# EAGLE board SI4464Breakout (EAGLE 6.3)
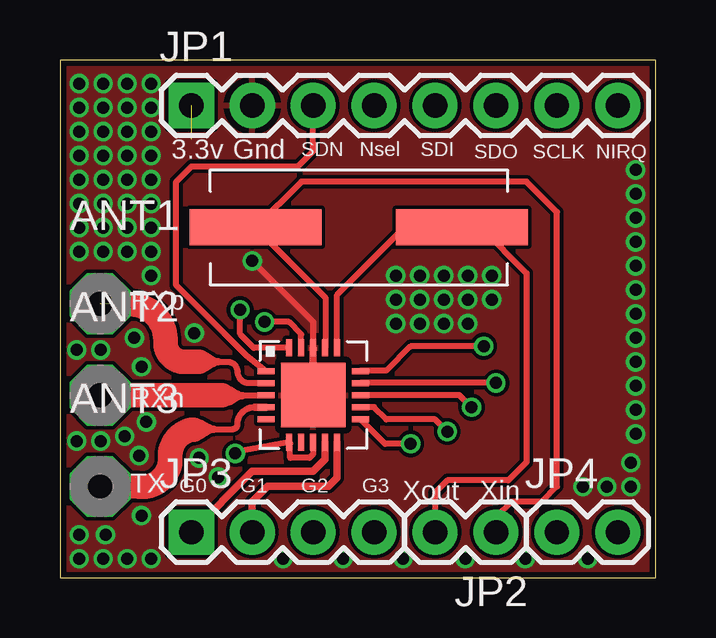
[diagram p0: board, top side]
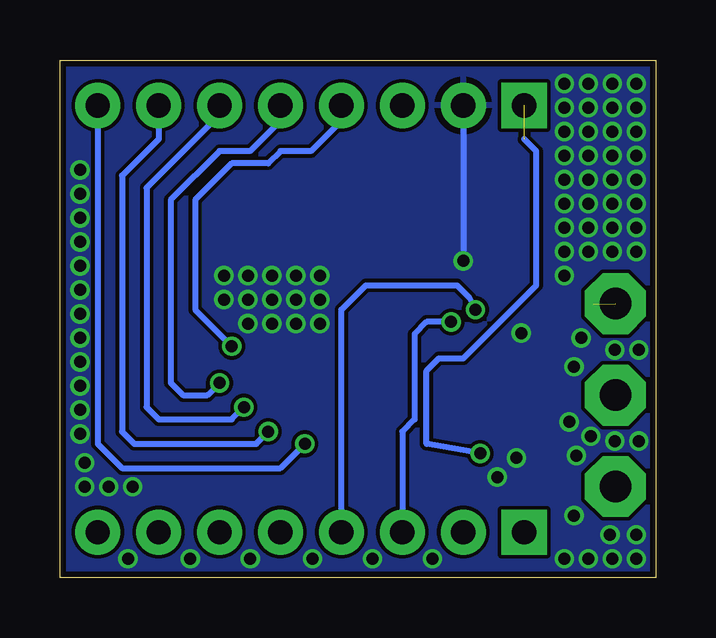
[diagram p1: board, bottom side, seen from below]

Size 24.83 x 21.58 mm. Coordinates in mm from the lower left corner, seen from the top.
Outline: 0,0 24.83,0 24.83,21.58 0,21.58 0,0
Copper layers (1*2*15*16): Top 0.035mm / dielectric 0.2mm / layer 2 0.0175mm / dielectric 1.1mm / layer 15 0.0175mm / dielectric 0.2mm / Bottom 0.035mm
Design rules "SeeedStudio_DRU_no_angle_20130527": minimum track width 6mil, minimum drill 12mil, track to track 6mil, track to pad 6mil, pad to pad 6mil, via to via 6mil, smd to smd 0mil, copper to edge 10mil, drill to drill 10mil, minimum pad ring 6mil, minimum via ring 6mil, stop-mask expansion 2mil, vias tented up to drill 25mil, thermal gap 10mil

## Footprints (pad centres in the part's own frame; a part is rotated, then mirrored left to right if it is on the bottom)
PAD-01 = drill 1.321 pad 2.54 octagon: 1 0,0
1X08 = drill 1.016 pad 1.88 square: 1 0,0 | drill 1.016 pad 1.88: 2 2.54,0; 3 5.08,0; 4 7.62,0; 5 10.16,0; 6 12.7,0; 7 15.24,0; 8 17.78,0
1X02 = drill 1.016 pad 1.88: 1 0,0; 2 2.54,0
1X04 = drill 1.016 pad 1.88 square: 1 0,0 | drill 1.016 pad 1.88: 2 2.54,0; 3 5.08,0; 4 7.62,0
QFN20+GNDPAD = smd 0.7 x 0.25: 1 -1.97,1; 2 -1.97,0.5; 3 -1.97,0; 4 -1.97,-0.5; 5 -1.97,-1; 11 1.97,-1; 12 1.97,-0.5; 13 1.97,0; 14 1.97,0.5; 15 1.97,1 | smd 0.25 x 0.7: 6 -1,-1.97; 7 -0.5,-1.97; 8 0,-1.97; 9 0.5,-1.97; 10 1,-1.97; 16 1,1.97; 17 0.5,1.97; 18 0,1.97; 19 -0.5,1.97; 20 -1,1.97 | smd 2.7 x 2.7: 21 0,0
CRYSTAL-SMD-10.5X4.8-2PIN = smd 5.5 x 1.5: P$1 -4.3,0; P$2 4.3,0

## Placement (x,y rotation side)
ANT1  [PAD-01]  1.67,11.43 0 top
ANT2  [PAD-01]  1.67,7.62 0 top
ANT3  [PAD-01]  1.67,3.81 0 top
JP1  [1X08]  5.48,19.68 0 top
JP2  [1X02]  18.18,1.91 180 top
JP3  [1X04]  5.48,1.91 0 top
JP4  [1X02]  20.72,1.91 0 top
U$1  SI4464  [QFN20+GNDPAD]  10.56,7.62 0 top
XTAL1  30 MHZ\  [CRYSTAL-SMD-10.5X4.8-2PIN]  12.46,14.61 0 top

## Library data of the parts
ANT1-ANT3 = discrete
JP1-JP3 XTAL1 = SparkFun
JP4 = SparkFun-Connectors
U$1 = Ava

## Nets
3.3V: JP1.1 U$1.6 U$1.8
GND: JP1.2 U$1.18 U$1.21
GPIO0: JP3.1 U$1.9
GPIO1: JP3.2 U$1.10
GPIO2: JP3.3 U$1.19
GPIO3: JP3.4 U$1.20
N$1: JP2.1 U$1.17 XTAL1.P$1
N$2: JP2.2 U$1.16 XTAL1.P$2
N$3: ANT3.1 U$1.4
N$4: ANT2.1 U$1.3
N$5: ANT1.1 U$1.2
NIRQ: JP1.8 U$1.11
NSEL: JP1.4 U$1.15
SCLK: JP1.7 U$1.12
SDI: JP1.5 U$1.14
SDN: JP1.3 U$1.1
SDO: JP1.6 U$1.13

## Tracks (layer width: path | path; a pad name or v marks a point on that pad's centre or on a via)
3.3V  (via drill 0.5)  (1 unrouted)
  Top 0.254: v7.31,5.19 7.37,5.25 U$1.6 9.6,5.61 9.6,5 10.4,5 10.56,5.16 U$1.8
  Bottom 0.254: v7.31,5.19 9.54,5.59 9.54,8.64 9.04,9.14 8.02,9.14 4.97,12.19 4.97,17.78 5.48,18.29
GND  (via drill 0.5)
  Top 0.254: v8.02,13.21 10.56,10.67 U$1.18
  Top 0.305: U$1.21 U$1.18
  Bottom 0.254: JP1.2 v8.02,13.21
  other vias: 5.6,10.2 5.8,5 6.6,4.2 3.4,2.6 0.8,1.8 0.8,0.8 2.8,0.8 1.8,0.8 3.8,0.8 1.8,14.6 1.8,15.6 1.8,16.6 1.8,17.6 1.8,19.6 1.8,18.6 1.8,20.6 0.8,20.6 2.8,20.6 0.8,19.6 0.8,18.6 0.8,17.6 0.8,16.6 0.8,15.6 0.8,14.6 2.8,14.6 2.8,15.6 2.8,16.6 2.8,18.6 2.8,17.6 2.8,19.6 9.3,0.8 11.8,0.8 14.3,0.8 16.9,0.8 19.4,0.8 22,0.8 23.8,4.8 24,6 24,7 24,8 24,10 24,13 24,9 24,11 24,12 24,14 24,15 24,16 24,17 23.8,3.8 22.8,3.8 21.8,3.8 14,11.6 15,11.6 16,11.6 17,11.6 18,11.6 14,10.6 15,10.6 16,10.6 17,10.6 16,12.6 14,12.6 18,12.6 15,12.6 17,12.6 0.8,13.6 2.8,13.6 1.8,13.6 3.8,13.6 3.8,12.6 3.8,14.6 3.8,15.6 3.8,16.6 3.8,17.6 3.8,18.6 3.8,19.6 3.8,20.6 0.7,9.5 0.7,5.7 3.4,8.8 3.1,10 1.7,5.7 2.7,5.9 3.6,6.5 1.7,9.5 3.3,5.1 1.9,1.8
  pour Bottom (isolate 0.1): 0,21.6 24.8,21.6 24.8,0 0,0
  pour Top (isolate 0.1): 0,21.6 24.8,21.6 24.8,0 0,0
GPIO0
  Top 0.305: JP3.1 8.02,4.45 10.56,4.45 11.06,4.95 U$1.9
GPIO1
  Top 0.305: JP3.2 8.02,3.17 8.66,3.81 11.2,3.81 11.56,4.17 U$1.10
GPIO2  (via drill 0.5)
  Top 0.254: U$1.19 10.06,10.15 9.54,10.67 v8.53,10.67
  Bottom 0.254: v8.53,10.67 9.54,10.67 10.05,10.16 10.05,6.6 10.56,6.1 JP3.3
GPIO3  (via drill 0.5)
  Top 0.254: U$1.20 8.08,9.59 7.51,10.16 v7.51,11.18
  Bottom 0.254: JP3.4 13.1,11.18 12.08,12.19 8.27,12.19 7.77,11.68 v7.51,11.18
N$1
  Top 0.254: XTAL1.P$1 8.16,14.59 11.07,11.68 U$1.17 | XTAL1.P$1 8.16,14.12 8.02,13.97 | XTAL1.P$1 10.07,16.51 19.45,16.51 20.72,15.24 20.72,3.81 20.08,3.17 18.81,3.17 18.18,2.54 JP2.1
N$2
  Top 0.254: U$1.16 11.56,11.79 14.37,14.61 XTAL1.P$2 17.54,14.61 19.45,12.7 19.45,4.83 18.69,4.06 16.15,4.06 15.64,3.56 JP2.2
N$3
  Top 0.254: 6.4,6.2 7.2,6.2 arc90 7.4,6.4 arc-90 8.12,7.12
  Top 0.305: ANT3.1 2.4,3.81 2.94,3.81 | 8.12,7.12 U$1.4 | 6.2,6.2 6.4,6.2
  Top 0.406: 6,6.2 6.2,6.2
  Top 0.61: 5.8,6.2 6,6.2
  Top 0.813: 5.58,6.18 5.78,6.18 arc90 5.8,6.2
  Top 1.016: 5.48,6.18 5.58,6.18 arc90 4.6,5 4.6,4.8 arc-90 3.21,3.81 2.4,3.81
N$4
  Top 0.254: 7.6,7.6 arc-90 7.62,7.62 U$1.3
  Top 0.305: 7.4,7.6 7.6,7.6
  Top 0.406: 7.2,7.6 7.4,7.6
  Top 0.61: 7,7.6 7.2,7.6
  Top 0.813: 6.75,7.62 arc90 6.77,7.6 7,7.6
  Top 1.016: 6.75,7.62 ANT2.1
N$5  (1 unrouted)
  Top 0.254: U$1.2 7.88,8.12 arc-90 7.4,8.6 arc90 7,9 6.6,9
  Top 0.305: 6.4,9 6.6,9
  Top 0.406: 6.2,9 6.4,9
  Top 0.61: 6,9 6.2,9
  Top 0.813: 3,11.4 2.6,11.4 | 5.8,9 6,9
  Top 1.016: 3,11.4 arc-90 4.4,9.8 arc90 5.2,9 5.8,9
NIRQ  (via drill 0.5)
  Top 0.254: v14.62,5.59 13.56,5.59 U$1.11
  Bottom 0.254: JP1.8 23.26,5.59 22.24,4.57 15.64,4.57 v14.62,5.59
NSEL  (via drill 0.5)
  Top 0.254: v17.67,9.65 14.62,9.65 13.61,8.64 12.55,8.64 U$1.15
  Bottom 0.254: JP1.4 13.1,19.05 14.37,17.78 15.64,17.78 16.15,17.27 17.67,17.27 19.2,15.75 19.2,11.18 v17.67,9.65
SCLK  (via drill 0.5)
  Top 0.254: v16.15,6.1 15.64,6.6 13.61,6.6 13.1,7.11 U$1.12
  Bottom 0.254: JP1.7 20.72,18.29 22.24,16.76 22.24,6.1 21.74,5.59 16.66,5.59 v16.15,6.1
SDI  (via drill 0.5)
  Top 0.254: v18.18,8.13 U$1.14
  Bottom 0.254: JP1.5 15.64,19.05 16.91,17.78 18.18,17.78 20.21,15.75 20.21,8.13 19.7,7.62 18.69,7.62 v18.18,8.13
SDN
  Top 0.254: U$1.1 7.78,9.26 4.85,12.19 4.85,16.51 5.48,17.14 9.93,17.14 10.56,17.78 JP1.3
SDO  (via drill 0.5)
  Top 0.254: v17.16,7.11 16.66,7.62 U$1.13
  Bottom 0.254: JP1.6 18.18,19.3 21.23,16.26 21.23,7.11 20.72,6.6 17.67,6.6 v17.16,7.11

## Text on the board
tPlace: SDN | Nsel | SDI | 3.3v | Gnd | SDO | SCLK | NIRQ | RXp | RXn | TX | G0 | G1 | G2 | G3 | Xout | Xin